# Altium PCB Four-leg-inverter.PcbDoc (part 2 of 2)
Units mm, origin at the board's own origin, x right, y up, seen from the top; angles counter-clockwise.
Board outline 253 x 158 mm, 4 copper layers (Top Layer, Reg_pos, REG_GND, Bottom Layer), stack 0.603 mm thick; 144 components, 93 nets, 427 pads, 715 vias.
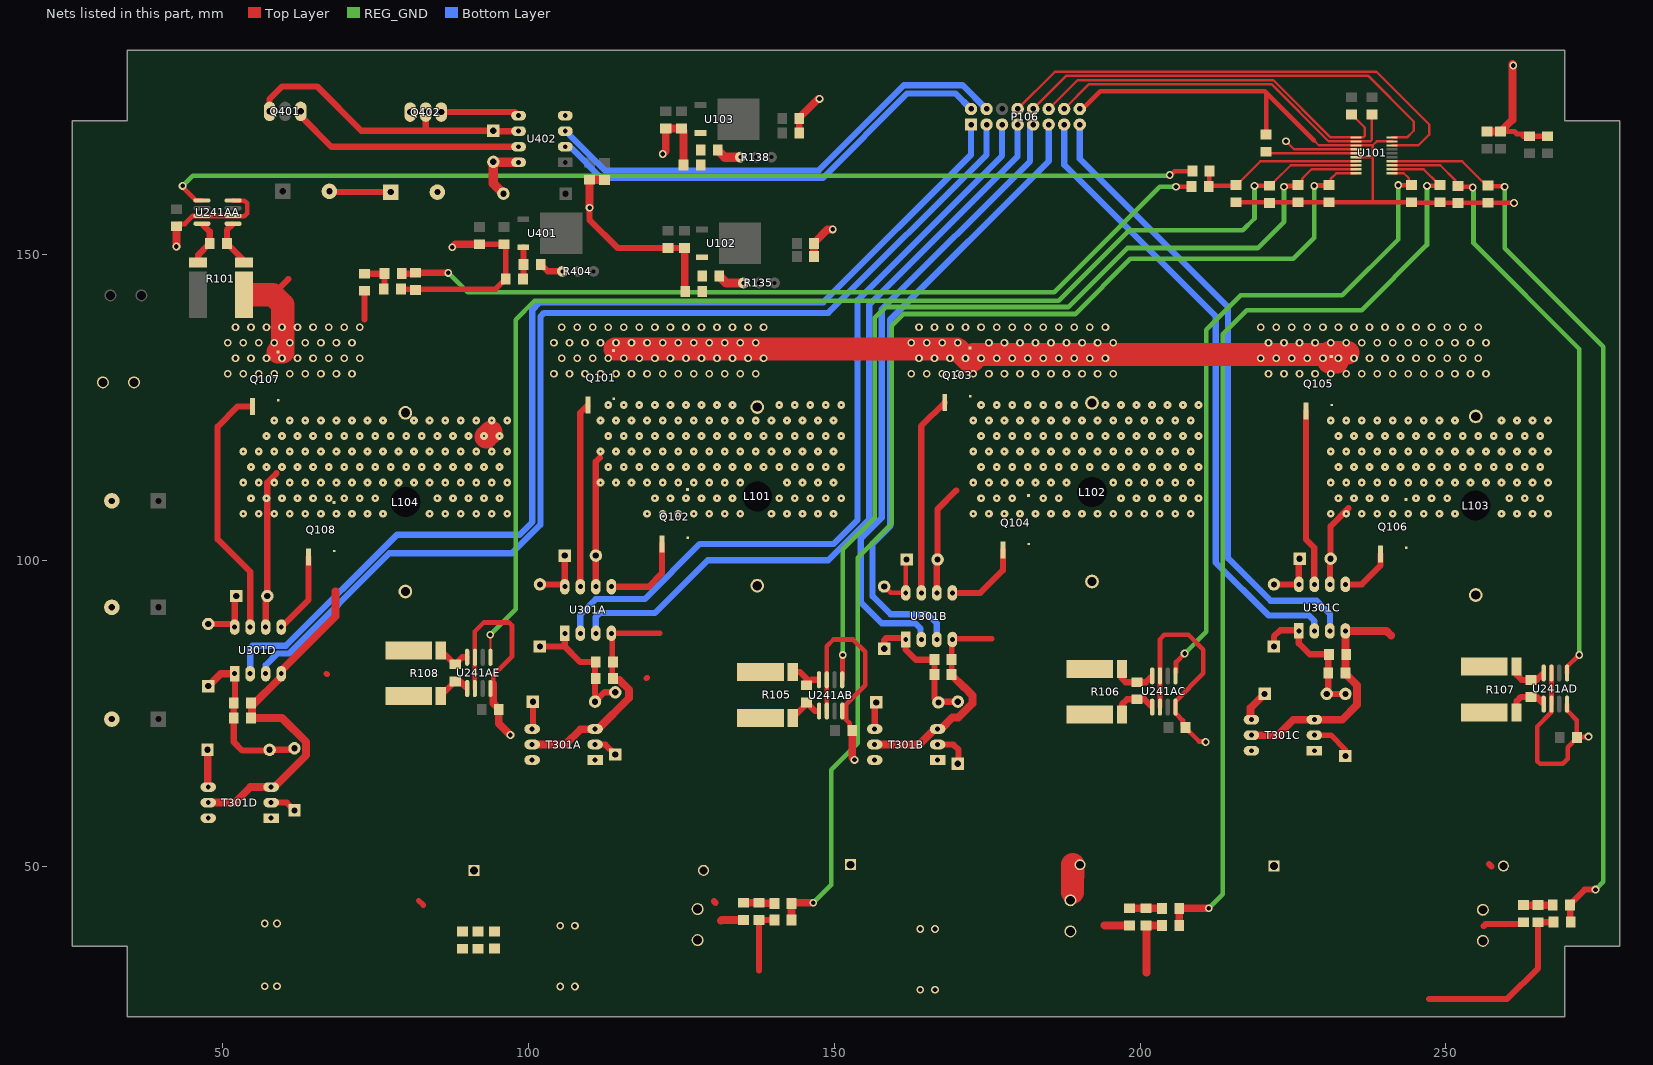
[diagram p4: the nets of this part, all layers, seen from the top]

## Via types
v1: diameter 1.27, hole 0.381, Top Layer to Bottom Layer, 436 vias
v2: diameter 1.27, hole 0.711, Top Layer to Bottom Layer, 228 vias
v3: diameter 1.27, hole 0.762, Top Layer to Bottom Layer, 47 vias
v4: diameter 5, hole 3, Top Layer to Bottom Layer, 4 vias

## Nets (pads, with @x,y where several pads share a name; then routed paths per layer and width w, separated by ;. In a path a pad name is that pad's centre, name@x,y a point inside that pad or via, vN(x,y) a via of type N, cw(c..) or ccw(c..) an arc to the next point about the centre after c; other vN are vias at no path point) (continued)
GND: C101.2 C102.2 C103.2 C104.1 C108.1 C109.1 C110.1 C116.1 C117.1 C118.1 C119.1 C120.1 C121.1 C122.1 C123.1 C124.1 C125.1 C126.1 C127.1 C128.1 C201A.1 C201B.1 C201C.1 C201D.1 C201E.1 C301A.1 C301B.1 C301C.1 C301D.1 C302A.1 C302B.1 C302C.1 C302D.1 C401.1 C402.1 C403.1 C404.1 C407.2 P102.1 P102.2 P106.16 Q102.2 Q104.2 Q106.2 Q108.2 Q402.3 R104.1 R109.2 R110.1 R111.2 R113.1 R116.1 R119.1 R123.1 R124.1 R125.1 R126.1 R127.1 R128.1 R129.1 R130.1 R133.1 R136.1 R402.1 T301A.3 T301A.5 T301B.3 T301B.5 T301C.3 T301C.5 T301D.3 T301D.5 U101.3 U101.4 U101.6 U101.19 U241AA.2 U241AA.4 U241AA.7 U241AB.2 U241AB.4 U241AB.7 U241AC.2 U241AC.4 U241AC.7 U241AD.2 U241AD.4 U241AD.7 U241AE.2 U241AE.4 U241AE.7 U301A.4 U301B.4 U301C.4 U301D.4 U402.4 | length 642.1
  Top Layer w0.381: v3(223.85,168.529) 225.167,167.212 U101.4@235.306,167.212 ; 228.346,168.726 229.21,167.862 U101.3@235.306,167.862 238.023,167.862 ; U101.6@235.306,165.912 238.023,165.912 ; 237.974,167.212 238.023,167.163 ; 238.227,158.56 238.023,158.764 238.023,165.912 ; U101.19@241.198,168.512 238.673,168.512 238.023,167.862 ; 238.023,165.912 238.023,167.163 ; 238.023,167.163 238.023,167.862
  Top Layer w0.762: C201A.1@42.418,154.623 42.809,155.014 43.819,155.014 45.125,156.32 U241AA.7@46.59,156.32 U241AA.2@51.69,156.32 51.721,156.289 52.888,156.289 52.897,156.28 53.529,156.28 53.975,156.726 53.975,158.383 53.529,158.829 51.721,158.829 U241AA.4@51.69,158.86 ; U241AE.2@91.226,79.063 U241AE.7@91.226,84.163 91.226,88.375 92.71,89.859 96.774,89.859 97.282,89.351 97.282,84.271 94.234,81.223 94.234,79.826 ; U241AB.2@148.757,75.38 U241AB.7@148.757,80.48 148.757,85.962 149.86,87.065 153.035,87.065 155.067,85.033 155.067,79.572 151.892,76.397 151.892,73.984 152.489,73.387 152.489,72.625 C201B.1@152.908,72.206 ; P106.16@190.119,173.806 190.463,173.806 191.018,174.361 191.093,174.361 193.459,176.727 220.345,176.727 220.599,176.473 ; U241AC.2@203.24,76.015 U241AC.7@203.24,81.115 203.24,87.105 203.962,87.827 207.899,87.827 210.312,85.414 210.312,81.535 205.78,77.003 U241AC.4@205.78,76.015 205.78,75.027 206.99,73.817 206.99,73.021 209.613,70.398 210.596,70.398 v3(210.693,70.301) ; R130.1@215.646,158.56 R126.1@225.806,158.56 R125.1@230.886,158.56 238.227,158.56 R123.1@244.348,158.56 244.409,158.5 261.052,158.5 v3(261.112,158.439) ; C120.1@220.599,169.621 220.599,176.473 ; 228.346,168.726 220.599,176.473 ; U241AD.7@267.248,82.586 U241AD.7@267.248,81.598 U241AD.2@267.248,76.498 267.217,76.467 267.217,75.136 264.922,72.841 264.922,67.191 265.368,66.745 269.113,66.745 269.902,67.534 269.902,69.466 271.399,70.963 C201D.1@271.399,71.063 ; U241AD.4@269.788,76.498 269.788,75.51 271.399,73.899 C201D.1@271.399,71.063 ; v3(273.304,71.19) 273.241,71.127 271.463,71.127 C201D.1@271.399,71.063
  Top Layer w0.889: 66.929,81.477 67.056,81.35 ; R104.1@79.121,144.342 94.615,144.342 R402.1@96.266,145.993 96.266,151.454 C402.1@96.012,151.708 C401.1@91.948,151.708 ; 82.042,44.393 82.798,43.637 ; C407.2@84.963,160.344 C407.2@85.09,160.217 ; C301A.1@113.792,80.715 113.665,80.842 113.665,87.954 U301A.4@113.538,88.081 121.412,88.081 ; 119.253,80.715 119.38,80.842 ; T301B.5@156.464,69.793 156.566,69.895 T301B.5@156.591,69.895 ; C302B.1@169.164,81.35 C301B.1@169.164,83.763 169.164,86.938 U301B.4@169.291,87.065 169.418,87.192 175.768,87.192 ; C118.1@258.953,170.123 261.187,170.123 261.593,169.717 262.535,169.717 C116.1@262.89,169.361 ; 262.636,169.361 C116.1@262.89,169.361 ; 265.557,169.361 C116.1@263.652,169.361 C116.1@262.89,169.361
  Top Layer w1.016: v3(109.982,157.677) 109.982,155.645 114.541,151.086 C122.1@122.809,151.086 C121.1@125.476,151.086 ; 137.668,32.963 R113.1@137.668,41.218 C108.1@140.208,41.218 ; C128.1@144.272,169.869 C127.1@144.272,172.282 ; 247.269,28.264 259.969,28.264 265.049,33.344 R119.1@265.049,40.837 C110.1@267.589,40.837
  Top Layer w1.27: v3(42.418,151.327) C201A.1@42.418,154.623 ; T301D.5@47.625,60.395 51.943,60.395 54.483,62.935 T301D.3@57.912,62.935 58.395,62.935 63.627,68.167 63.627,70.301 59.69,74.238 C301D.1@54.61,74.238 54.775,74.403 54.775,76.206 59.563,80.994 U301D.4@59.563,81.477 59.563,81.96 68.453,90.85 68.453,94.939 ; v3(87.503,151.2) 88.011,151.708 C401.1@91.948,151.708 ; 94.234,79.826 94.234,76.63 95.129,75.735 C201E.1@95.129,75.635 95.129,73.343 v3(97.028,71.444) ; T301A.5@100.584,69.895 106.02,69.895 108.501,72.376 110.813,72.376 T301A.3@110.871,72.435 111.354,72.435 116.441,77.522 116.441,78.855 114.846,80.45 113.957,80.45 113.792,80.615 C301A.1@113.792,80.715 ; v3(109.982,157.677) C403.1@109.982,162.249 110.014,162.217 112.363,162.217 C404.1@112.395,162.186 ; v3(121.92,166.44) 122.428,166.948 C126.1@122.428,170.631 C125.1@124.968,170.631 125.068,170.631 125.233,170.466 125.233,170.366 125.349,170.25 R136.1@125.349,164.662 ; C121.1@125.476,151.086 125.54,151.022 125.54,144.025 R133.1@125.603,143.961 ; C127.1@144.272,172.282 144.272,172.382 147.347,175.457 v3(147.574,175.457) ; C123.1@146.685,149.676 C124.1@146.685,151.835 ; C124.1@146.685,151.935 148.871,154.121 v3(149.733,154.121) ; C201B.1@152.908,72.206 152.908,67.761 v3(153.289,67.38) ; T301B.5@156.591,69.895 163.855,69.895 166.395,72.435 T301B.3@166.878,72.435 167.429,72.435 169.298,74.304 170.274,74.304 172.593,76.624 172.593,77.921 171.225,79.289 171.125,79.289 169.164,81.25 C302B.1@169.164,81.35 ; 201.041,32.582 201.041,40.196 R116.1@200.914,40.323 200.917,40.326 203.705,40.326 203.708,40.329 C109.1@203.575,40.329 ; T301C.5@218.186,71.419 222.479,71.419 225.019,73.959 T301C.3@228.473,73.959 233.02,73.959 235.458,76.397 235.458,79.599 233.553,81.504 C302C.1@233.553,81.604 U301C.4@233.553,88.462 240.284,88.462 241.046,87.7 ; C119.1@256.667,170.123 C118.1@258.953,170.123 260.858,172.028 260.858,181.172 260.985,181.045 v3(260.985,180.918)
HIN1: P106.5 U301A.2 | length 129.2
  Bottom Layer w1.016: U301A.2@108.458,88.081 108.458,91.129 110.998,93.669 118.999,93.669 128.016,102.686 149.86,102.686 153.797,106.623 153.797,142.564 177.419,166.186 P106.5@177.419,171.266
HIN2: P106.9 U301B.2 | length 103.5
  Bottom Layer w1.016: U301B.2@164.211,87.065 164.104,87.172 164.104,88.823 163.195,89.732 157.734,89.732 154.305,93.161 154.305,103.539 157.734,106.968 157.734,141.04 181.991,165.297 181.991,171.266 P106.9@182.499,171.266
HIN3: P106.13 U301C.2 | length 103.6
  Bottom Layer w1.016: P106.13@187.579,171.266 187.579,164.662 212.344,139.897 212.344,99.638 220.98,91.002 227.584,91.002 228.473,90.113 U301C.2@228.473,88.462
HIN4: P106.1 U301D.2 | length 180.7
  Bottom Layer w1.016: U301D.2@54.483,81.477 54.483,85.668 54.864,86.049 60.325,86.049 78.486,104.21 98.534,104.21 100.584,106.26 100.584,140.913 101.854,142.183 148.209,142.183 172.339,166.313 P106.1@172.339,171.266
HINP: P106.2 U402.2 | length 75.3
  Bottom Layer w1.016: U402.2@105.994,167.634 106.577,167.634 106.857,167.354 107.036,167.354 111.887,162.503 148.082,162.503 161.925,176.346 169.799,176.346 P106.2@172.339,173.806
HN: C405.1 Q401.3 Q402.2 T301A.1 T301B.1 T301C.1 T301D.1 U402.6 | length 49.9
  Top Layer w1.016: Q401.3@57.658,173.425 57.658,175.457 59.69,177.489 65.405,177.489 72.644,170.25 83.693,170.25 ; Q402.2@83.185,173.298 83.185,170.758 83.693,170.25 ; U402.6@98.374,170.174 94.31,170.174 C405.1@94.234,170.25 83.693,170.25
  other v3: 164.059,29.794 166.446,29.794 105.181,30.328 107.569,30.328 56.871,30.353 58.877,30.353 164.059,39.726 166.446,39.726 105.181,40.259 107.569,40.259 56.871,40.64 58.877,40.64
HO: Q401.1 U402.7 | length 38.7
  Top Layer w1.016: Q401.1@62.738,173.679 62.738,172.663 67.767,167.634 U402.7@98.374,167.634
HS+1: Q101.1 U301A.7 | length 30.1
  Top Layer w1.016: U301A.7@108.458,95.701 108.458,124.14 Q101.1@109.605,125.288
HS+2: Q103.1 U301B.7 | length 32.7
  Top Layer w1.016: U301B.7@164.211,94.685 164.211,121.981 Q103.1@168.037,125.808
HS+3: Q105.1 U301C.7 | length 28.9
  Top Layer w1.016: Q105.1@227.092,124.411 227.092,103.432 228.473,102.051 U301C.7@228.473,96.082
HS+4: Q107.1 U301D.7 | length 41.9
  Top Layer w1.016: U301D.7@54.483,89.097 54.483,98.114 49.149,103.448 49.149,121.863 52.459,125.173 Q107.1@54.714,125.173
HS-1: C303A.2 L101.1 Q101.2 Q102.3 U301A.6 | length 21
  Top Layer w1.016: U301A.6@110.998,95.701 C303A.2@110.998,100.4 ; C303A.2@110.998,100.781 110.998,116.148 111.633,116.783
  other v1: 119.38,107.639 121.92,107.639 124.46,107.639 127,107.639 129.54,107.639 132.08,107.639 134.62,107.639 139.7,107.639 142.24,107.639 144.78,107.639 147.32,107.639 149.86,107.639 120.65,110.179 123.19,110.179 125.73,110.179 128.27,110.179 130.81,110.179 133.35,110.179 140.97,110.179 143.51,110.179 146.05,110.179 148.59,110.179 151.13,110.179 111.76,112.719 114.3,112.719 116.84,112.719 119.38,112.719 121.92,112.719 124.46,112.719 127,112.719 129.54,112.719 132.08,112.719 134.62,112.719 142.24,112.719 144.78,112.719 147.32,112.719 149.86,112.719 113.03,115.259 115.57,115.259 118.11,115.259 120.65,115.259 123.19,115.259 125.73,115.259 128.27,115.259 130.81,115.259 133.35,115.259 135.89,115.259 138.43,115.259 140.97,115.259 143.51,115.259 146.05,115.259 148.59,115.259 151.13,115.259 111.76,117.799 114.3,117.799 116.84,117.799 119.38,117.799 121.92,117.799 124.46,117.799 127,117.799 129.54,117.799 132.08,117.799 134.62,117.799 137.16,117.799 139.7,117.799 142.24,117.799 144.78,117.799 147.32,117.799 149.86,117.799 113.03,120.339 115.57,120.339 118.11,120.339 120.65,120.339 123.19,120.339 125.73,120.339 128.27,120.339 130.81,120.339 133.35,120.339 135.89,120.339 138.43,120.339 140.97,120.339 143.51,120.339 146.05,120.339 148.59,120.339 151.13,120.339 111.76,122.879 114.3,122.879 116.84,122.879 119.38,122.879 121.92,122.879 124.46,122.879 127,122.879 129.54,122.879 132.08,122.879 134.62,122.879 137.16,122.879 139.7,122.879 142.24,122.879 144.78,122.879 147.32,122.879 149.86,122.879 113.03,125.419 115.57,125.419 118.11,125.419 120.65,125.419 123.19,125.419 125.73,125.419 128.27,125.419 130.81,125.419 133.35,125.419 140.97,125.419 143.51,125.419 146.05,125.419 148.59,125.419 151.13,125.419
HS-2: C303B.2 L102.1 Q103.2 Q104.3 U301B.6 | length 18.1
  Top Layer w1.016: U301B.6@166.751,94.685 166.751,100.019 C303B.2@166.878,100.146 166.878,108.401 169.926,111.449
  other v1: 172.72,107.639 175.26,107.639 177.8,107.639 180.34,107.639 182.88,107.639 185.42,107.639 187.96,107.639 190.5,107.639 193.04,107.639 195.58,107.639 198.12,107.639 200.66,107.639 203.2,107.639 205.74,107.639 208.28,107.639 173.99,110.179 176.53,110.179 179.07,110.179 184.15,110.179 186.69,110.179 196.85,110.179 199.39,110.179 201.93,110.179 204.47,110.179 207.01,110.179 209.55,110.179 172.72,112.719 175.26,112.719 177.8,112.719 180.34,112.719 182.88,112.719 185.42,112.719 187.96,112.719 195.58,112.719 198.12,112.719 200.66,112.719 203.2,112.719 205.74,112.719 208.28,112.719 173.99,115.259 176.53,115.259 179.07,115.259 181.61,115.259 184.15,115.259 186.69,115.259 189.23,115.259 191.77,115.259 194.31,115.259 196.85,115.259 199.39,115.259 201.93,115.259 204.47,115.259 207.01,115.259 209.55,115.259 172.72,117.799 175.26,117.799 177.8,117.799 180.34,117.799 182.88,117.799 185.42,117.799 187.96,117.799 190.5,117.799 193.04,117.799 195.58,117.799 198.12,117.799 200.66,117.799 203.2,117.799 205.74,117.799 208.28,117.799 173.99,120.339 176.53,120.339 179.07,120.339 181.61,120.339 184.15,120.339 186.69,120.339 189.23,120.339 191.77,120.339 194.31,120.339 196.85,120.339 199.39,120.339 201.93,120.339 204.47,120.339 207.01,120.339 209.55,120.339 172.72,122.879 175.26,122.879 177.8,122.879 180.34,122.879 182.88,122.879 185.42,122.879 187.96,122.879 190.5,122.879 193.04,122.879 195.58,122.879 198.12,122.879 200.66,122.879 203.2,122.879 205.74,122.879 208.28,122.879 173.99,125.419 176.53,125.419 179.07,125.419 181.61,125.419 184.15,125.419 186.69,125.419 189.23,125.419 194.31,125.419 196.85,125.419 199.39,125.419 201.93,125.419 204.47,125.419 207.01,125.419 209.55,125.419
HS-3: C303C.2 L103.1 Q105.2 Q106.3 U301C.6 | length 13.7
  Top Layer w1.016: U301C.6@231.013,96.082 231.013,100.146 C303C.2@231.14,100.273 231.14,105.607 234.061,108.528
  other v1: 231.14,107.639 233.68,107.639 236.22,107.639 238.76,107.639 241.3,107.639 243.84,107.639 246.38,107.639 248.92,107.639 251.46,107.639 259.08,107.639 261.62,107.639 264.16,107.639 266.7,107.639 232.41,110.179 234.95,110.179 237.49,110.179 240.03,110.179 245.11,110.179 247.65,110.179 250.19,110.179 260.35,110.179 262.89,110.179 265.43,110.179 231.14,112.719 233.68,112.719 236.22,112.719 238.76,112.719 241.3,112.719 243.84,112.719 246.38,112.719 248.92,112.719 251.46,112.719 254,112.719 256.54,112.719 259.08,112.719 261.62,112.719 264.16,112.719 266.7,112.719 232.41,115.259 234.95,115.259 237.49,115.259 240.03,115.259 242.57,115.259 245.11,115.259 247.65,115.259 250.19,115.259 252.73,115.259 255.27,115.259 257.81,115.259 260.35,115.259 262.89,115.259 265.43,115.259 231.14,117.799 233.68,117.799 236.22,117.799 238.76,117.799 241.3,117.799 243.84,117.799 246.38,117.799 248.92,117.799 251.46,117.799 254,117.799 256.54,117.799 259.08,117.799 261.62,117.799 264.16,117.799 266.7,117.799 232.41,120.339 234.95,120.339 237.49,120.339 240.03,120.339 242.57,120.339 245.11,120.339 247.65,120.339 250.19,120.339 252.73,120.339 255.27,120.339 257.81,120.339 260.35,120.339 262.89,120.339 265.43,120.339 231.14,122.879 233.68,122.879 236.22,122.879 238.76,122.879 241.3,122.879 243.84,122.879 246.38,122.879 248.92,122.879 251.46,122.879 259.08,122.879 261.62,122.879 264.16,122.879 266.7,122.879
HS-4: C303D.2 L104.1 Q107.2 Q108.3 U301D.6 | length 27
  Top Layer w1.016: U301D.6@57.023,89.097 57.023,93.923 C303D.2@57.277,94.177 57.277,112.719 58.801,114.243
  Top Layer w3.81: v1@93.091,120.212 93.853,120.974
  other v1: 53.34,107.639 55.88,107.639 58.42,107.639 60.96,107.639 63.5,107.639 66.04,107.639 68.58,107.639 71.12,107.639 73.66,107.639 76.2,107.639 83.82,107.639 86.36,107.639 88.9,107.639 91.44,107.639 93.98,107.639 96.52,107.639 54.61,110.179 57.15,110.179 59.69,110.179 62.23,110.179 64.77,110.179 67.31,110.179 69.85,110.179 72.39,110.179 74.93,110.179 85.09,110.179 87.63,110.179 90.17,110.179 92.71,110.179 95.25,110.179 53.34,112.719 55.88,112.719 58.42,112.719 60.96,112.719 63.5,112.719 66.04,112.719 68.58,112.719 71.12,112.719 73.66,112.719 76.2,112.719 78.74,112.719 81.28,112.719 83.82,112.719 86.36,112.719 88.9,112.719 91.44,112.719 93.98,112.719 96.52,112.719 54.61,115.259 57.15,115.259 59.69,115.259 62.23,115.259 64.77,115.259 67.31,115.259 69.85,115.259 72.39,115.259 74.93,115.259 77.47,115.259 80.01,115.259 82.55,115.259 85.09,115.259 87.63,115.259 90.17,115.259 92.71,115.259 95.25,115.259 53.34,117.799 55.88,117.799 58.42,117.799 60.96,117.799 63.5,117.799 66.04,117.799 68.58,117.799 71.12,117.799 73.66,117.799 76.2,117.799 78.74,117.799 81.28,117.799 83.82,117.799 86.36,117.799 88.9,117.799 91.44,117.799 93.98,117.799 96.52,117.799 57.15,120.339 59.69,120.339 62.23,120.339 64.77,120.339 67.31,120.339 69.85,120.339 72.39,120.339 74.93,120.339 77.47,120.339 80.01,120.339 82.55,120.339 85.09,120.339 87.63,120.339 90.17,120.339 92.71,120.339 95.25,120.339 58.42,122.879 60.96,122.879 63.5,122.879 66.04,122.879 68.58,122.879 71.12,122.879 73.66,122.879 76.2,122.879 81.28,122.879 83.82,122.879 86.36,122.879 88.9,122.879 91.44,122.879 93.98,122.879 96.52,122.879
IS+1: C111.2 R101.2 U241AA.8 | length 7.4
  Top Layer w1.016: R101.2@45.974,148.711 45.974,149.936 C111.2@47.873,151.835 47.873,153.767 U241AA.8@46.802,154.838
IS+2: C112.2 R105.2 U241AB.8 | length 6
  Top Layer w1.016: R105.2@143.18,81.731 144.399,81.731 145.415,80.715 C112.2@145.415,79.578 146.317,80.48 U241AB.8@147.294,80.48
IS+3: C113.2 R106.2 U241AC.8 | length 6.9
  Top Layer w1.016: R106.2@197.028,82.239 197.028,80.766 196.977,80.715 197.606,80.086 C113.2@199.517,80.086 200.941,80.086 U241AC.8@201.762,80.907
IS+4: C114.2 R107.2 U241AD.8 | length 6.3
  Top Layer w1.016: R107.2@261.544,82.62 261.544,81.299 262.376,80.467 C114.2@263.906,80.467 264.847,80.467 U241AD.8@265.821,81.44
IS+5: C115.2 R108.2 U241AE.8 | length 5.6
  Top Layer w1.016: R108.2@85.649,85.287 87.929,83.007 C115.2@88.011,83.007 89.167,84.163 U241AE.8@89.824,84.163
IS-1: C111.1 R101.3 U241AA.1 | length 7.7
  Top Layer w1.016: U241AA.1@51.543,154.903 50.673,154.033 C111.1@50.673,151.835 53.442,149.066 R101.3@53.442,148.711
IS-2: C112.1 R105.3 U241AB.1 | length 5.9
  Top Layer w1.016: R105.3@143.18,74.263 145.415,76.499 C112.1@145.415,76.778 146.813,75.38 U241AB.1@147.275,75.38
IS-3: C113.1 R106.3 U241AC.1 | length 7.2
  Top Layer w1.016: R106.3@197.028,74.771 197.028,76.448 197.866,77.286 C113.1@199.517,77.286 200.699,77.286 U241AC.1@201.769,76.216
IS-4: C114.1 R107.3 U241AD.1 | length 6.8
  Top Layer w1.016: R107.3@261.544,75.152 261.544,76.956 262.255,77.667 C114.1@263.906,77.667 264.809,77.667 U241AD.1@265.798,76.678
IS-5: C115.1 R108.3 U241AE.1 | length 5.5
  Top Layer w1.016: R108.3@85.649,77.819 85.649,77.845 C115.1@88.011,80.207 88.812,80.207 U241AE.1@89.767,79.252
ISO1: R121.2 U241AA.5 | length 170.1
  Top Layer w0.762: v3@43.561,160.979 43.561,160.901 45.602,158.86 U241AA.5@46.59,158.86 ; v3@204.724,163.011 204.988,163.011 205.623,163.646 R121.2@208.534,163.646
  REG_GND w0.762: v3(43.434,161.233) 45.085,162.884 v3@204.851,162.884
  other v3: 204.851,163.011
ISO2: R126.2 U101.9 U241AB.5 | length 154.1
  Top Layer w0.381: R126.2@225.879,161.36 226.489,161.97 226.489,162.424 228.027,163.962 U101.9@235.306,163.962
  Top Layer w0.762: U241AB.5@151.297,80.48 151.328,80.511 151.328,84.469 v2(151.384,84.525) ; v3@223.393,160.979 223.617,161.203 225.649,161.203 R126.2@225.806,161.36
  REG_GND w0.762: v2(151.384,84.525) 151.257,84.525 151.384,84.652 151.384,101.797 156.591,107.004 156.591,139.643 158.369,141.421 188.214,141.421 197.866,151.073 219.202,151.073 223.52,155.391 v3@223.52,161.155
  other v3: 223.52,161.106
ISO3: R123.2 U101.11 U241AC.5 | length 111.6
  Top Layer w0.381: U241AC.5@205.78,81.115 205.78,81.644 U241AC.5@205.867,81.731 ; U101.11@241.198,163.312 243.109,163.312 243.912,162.508 243.912,161.796 R123.2@244.348,161.36
  Top Layer w0.762: U241AC.5@205.867,81.731 205.867,83.382 v3(207.264,84.779) ; v3(242.189,161.36) R123.2@244.348,161.36
  REG_GND w0.762: v3(207.264,84.779) 210.82,88.335 210.82,137.738 216.408,143.326 233.045,143.326 242.189,152.47 v3(242.189,161.36)
ISO4: R127.2 U101.13 U241AD.5 | length 102.4
  Top Layer w0.381: U101.13@241.198,164.612 249.048,164.612 251.567,162.093 251.567,161.97 R127.2@252.152,161.384
  Top Layer w0.762: R127.2@251.968,161.233 252.125,161.076 254.284,161.076 v3(254.381,160.979) ; U241AD.5@269.788,81.598 269.788,82.586 v3@271.78,84.578
  REG_GND w0.762: v3@254.508,161.106 254.508,151.835 271.78,134.563 v3(271.78,84.525)
ISO5: R129.2 U101.8 U241AE.5 | length 207.7
  Top Layer w0.381: v2(93.726,87.827) 93.766,87.787 U241AE.5@93.766,84.163 ; R129.2@221.361,161.36 221.361,161.393 221.817,161.849 221.85,161.849 224.613,164.612 U101.8@235.306,164.612
  Top Layer w0.762: v3(218.694,161.233) 218.697,161.236 221.104,161.236 R129.2@221.107,161.239
  REG_GND w0.762: v2(93.726,87.827) 97.902,92.003 97.902,139.374 100.965,142.437 186.69,142.437 198.247,153.994 216.789,153.994 218.694,155.899 v3(218.694,161.233)
LIN1: P106.7 U301A.3 | length 128.6
  Bottom Layer w1.016: U301A.3@110.998,88.081 110.998,90.748 111.633,91.383 120.65,91.383 129.286,100.019 148.989,100.019 155.702,106.732 155.702,141.802 179.959,166.059 P106.7@179.959,171.266
LIN2: P106.11 U301B.3 | length 104.2
  Bottom Layer w1.016: U301B.3@166.751,87.065 166.751,89.732 165.291,91.193 159.195,91.193 156.25,94.137 156.25,102.726 159.131,105.607 159.131,139.389 185.039,165.297 185.039,171.139 184.912,171.266 P106.11@185.039,171.266
LIN3: P106.15 U301C.3 | length 104.2
  Bottom Layer w1.016: P106.15@190.119,171.266 190.119,165.678 214.376,141.421 214.376,100.36 221.321,93.415 228.854,93.415 231.013,91.256 U301C.3@231.013,88.462
LIN4: P106.3 U301D.3 | length 179
  Bottom Layer w1.016: U301D.3@57.023,81.477 57.023,82.874 58.928,84.779 60.851,84.779 77.234,101.162 97.282,101.162 101.927,105.807 101.927,139.864 102.522,140.459 149.025,140.459 174.879,166.313 174.879,171.393 P106.3@174.879,171.266
LINP: P106.4 U402.3 | length 79
  Bottom Layer w1.016: U402.3@105.994,170.174 106.275,170.174 106.705,169.743 106.705,169.546 112.478,163.773 147.447,163.773 161.374,177.7 170.96,177.7 174.853,173.806 P106.4@174.879,173.806
LO: Q402.1 U402.5 | length 12.9
  Top Layer w1.016: Q402.1@85.725,173.298 97.79,173.298 U402.5@98.374,172.714
LS+1: Q102.1 U301A.5 | length 14
  Top Layer w1.016: U301A.5@113.538,95.701 119.634,95.701 121.809,97.876 Q102.1@121.809,102.694
LS+2: Q104.1 U301B.5 | length 13.1
  Top Layer w1.016: U301B.5@169.291,94.685 173.863,94.685 177.562,98.384 Q104.1@177.562,101.678
LS+3: Q106.1 U301C.5 | length 8.9
  Top Layer w1.016: U301C.5@233.553,96.082 236.22,96.082 239.284,99.146 Q106.1@239.284,101.043
LS+4: Q108.1 U301D.5 | length 13.3
  Top Layer w1.016: U301D.5@59.563,89.097 64.024,93.558 Q108.1@64.024,100.535
NetC105_1: C105.1 C106.1 C107.1 R108.4 R109.1 R110.2 R111.1
NetC105_2: C105.2 P103.1 P103.2 R105.4 R112.2 | length 4.1
  Top Layer w1.016: 130.302,44.266 130.55,44.018
  Top Layer w1.27: 131.445,41.091 131.572,41.218 R112.2@135.128,41.218
NetC106_2: C106.2 P104.1 P104.2 R106.4 R115.2 | length 9.2
  Top Layer w1.016: 188.917,45.686 189.316,45.288
  Top Layer w1.27: 194.183,40.329 194.189,40.323 R115.2@198.247,40.323
  Top Layer w3.81: 188.917,45.686 188.976,50.256 188.976,50.27
NetC107_2: C107.2 P105.1 P105.2 R107.4 R118.2 | length 7.3
  Top Layer w1.016: 256.159,40.202 256.502,40.545 262.344,40.545 R118.2@262.636,40.837 ; 257.048,50.337 257.423,49.962
NetC120_2: C120.2 U101.5 | length 14.8
  Top Layer w0.381: C120.2@220.599,166.821 220.853,166.567 223.73,166.567 223.735,166.562 U101.5@235.306,166.562
NetC301A_2: C301A.2 C302A.2 D301A.A D302A.K D303A.K U301A.1 | length 23.3
  Top Layer w1.016: D301A.A@101.473,85.541 D301A.A@101.854,85.922 105.918,85.922 ; U301A.1@105.918,88.081 105.918,85.922 ; D303A.K@114.173,78.429 112.395,78.429 D302A.K@110.871,76.905 110.871,83.261 C302A.2@110.992,83.382 108.458,83.382 105.918,85.922
NetC301B_2: C301B.2 C302B.2 D301B.A D302B.K D303B.K U301B.1 | length 22.7
  Top Layer w1.016: D301B.A@158.137,85.569 158.137,86.96 158.496,87.319 161.417,87.319 U301B.1@161.671,87.065 161.671,85.414 163.322,83.763 C301B.2@166.364,83.763 C302B.2@166.364,81.35 166.364,77.419 D302B.K@167.005,76.778 167.132,76.905 D303B.K@170.18,76.905
NetC301C_2: C301C.2 C302C.2 D301C.A D302C.K D303C.K U301C.1 | length 23.3
  Top Layer w1.016: D301C.A@221.869,85.922 221.869,87.573 222.885,88.589 225.806,88.589 U301C.1@225.933,88.462 225.933,86.43 227.711,84.652 230.626,84.652 230.753,84.525 C302C.2@230.753,81.604 230.753,78.423 D302C.K@230.505,78.175 D303C.K@233.553,78.175
NetC301D_2: C301D.2 C302D.2 D301D.A D302D.K D303D.K U301D.1 | length 26.9
  Top Layer w1.016: C301D.2@51.81,74.238 51.81,70.307 53.213,68.904 D302D.K@57.658,68.904 ; C301D.2@52.017,74.545 51.895,74.545 51.81,74.63 51.81,76.444 52.017,76.651 U301D.1@52.017,81.477 ; D302D.K@57.658,69.031 61.193,69.031 61.447,69.285 D303D.K@61.722,69.285
  Top Layer w1.27: D301D.A@47.625,79.445 49.657,81.477 U301D.1@51.943,81.477
NetC303A_1: C303A.1 D301A.K U301A.8 | length 9.5
  Top Layer w1.016: D301A.K@101.854,96.082 105.537,96.082 U301A.8@105.918,95.701 105.918,96.082 105.918,100.4 C303A.1@106.299,100.781
NetC303B_1: C303B.1 D301B.K U301B.8 | length 9.5
  Top Layer w0.762: D301B.K@158.137,95.729 159.181,94.685 U301B.8@161.671,94.685 161.671,100.019 C303B.1@161.798,100.146
NetC303C_1: C303C.1 D301C.K U301C.8 | length 8.3
  Top Layer w1.016: D301C.K@221.869,96.082 U301C.8@225.933,96.082 225.933,100.146 C303C.1@226.06,100.273
NetC303D_1: C303D.1 D301D.K U301D.8 | length 9.7
  Top Layer w1.016: D301D.K@47.625,89.605 51.435,89.605 U301D.8@51.943,89.097 51.943,93.923 C303D.1@52.197,94.177
NetC405_2: C405.2 D401.K U402.8 | length 10.1
  Top Layer w1.524: D401.K@95.885,159.963 94.234,161.614 C405.2@94.234,165.17 94.31,165.094 U402.8@98.374,165.094
NetC406_2: C406.2 C407.1 T301A.6 T301B.6 T301C.6 T301D.6 | length 10.1
  Top Layer w1.016: C406.2@67.437,160.344 67.564,160.217 C407.1@77.47,160.217
NetD302A_A: D302A.A T301A.4 | length 4.5
  Top Layer w1.016: T301A.4@100.584,72.435 100.711,72.562 D302A.A@100.711,76.905
NetD302B_A: D302B.A T301B.4 | length 4.4
  Top Layer w1.016: T301B.4@156.591,72.435 156.591,76.524 D302B.A@156.845,76.778
NetD302C_A: D302C.A T301C.4 | length 5.2
  Top Layer w1.016: T301C.4@218.059,74.111 218.186,73.984 T301C.4@218.186,73.959
  Top Layer w1.27: T301C.4@218.059,74.111 218.059,75.889 D302C.A@220.345,78.175
NetD302D_A: D302D.A T301D.4 | length 6.1
  Top Layer w1.27: D302D.A@47.498,69.031 47.562,68.968 47.562,62.999 T301D.4@47.625,62.935
NetD303A_A: D303A.A T301A.2 | length 4
  Top Layer w1.016: T301A.2@110.871,69.895 112.547,69.895 D303A.A@114.173,68.269
NetD303B_A: D303B.A T301B.2 | length 6.1
  Top Layer w1.016: T301B.2@166.878,69.895 169.443,69.895 170.307,69.031 170.307,66.872 D303B.A@170.18,66.745
NetD303C_A: D303C.A T301C.2 | length 7.1
  Top Layer w0.889: T301C.2@228.473,71.419 231.165,71.419 233.553,69.031 D303C.A@233.553,68.015
NetD303D_A: D303D.A T301D.2 | length 4.3
  Top Layer w1.016: T301D.2@57.912,60.395 60.452,60.395 D303D.A@61.722,59.125
NetL101_2: L101.2 R105.1
NetL102_2: L102.2 R106.1
NetL103_2: L103.2 R107.1
NetL104_2: L104.2 R108.1
NetQ101_3: Q101.3 Q103.3 Q105.3 Q107.3 R101.4 R102.2 | length 145.6
  Top Layer w1.016: 58.166,143.453 60.706,145.993 ; 73.152,139.389 R102.2@73.152,144.082
  Top Layer w3.81: R101.4@53.975,143.453 58.166,143.453 59.817,141.802 59.817,134.088 Q107.3@59.03,134.088 ; Q101.3@114.116,134.563 119.38,134.563 124.46,134.563 125.73,134.563 132.08,134.563 133.35,134.563 170.061,134.563 172.187,132.437 ; 172.72,132.785 172.72,133.674 230.861,133.674 ; 230.861,132.437 232.189,132.437 ; 230.988,133.928 233.934,133.928
  other v2: 50.8,130.499 53.34,130.499 55.88,130.499 58.42,130.499 60.96,130.499 63.5,130.499 66.04,130.499 68.58,130.499 71.12,130.499 104.14,130.499 106.68,130.499 109.22,130.499 111.76,130.499 114.3,130.499 116.84,130.499 119.38,130.499 121.92,130.499 124.46,130.499 127,130.499 129.54,130.499 132.08,130.499 134.62,130.499 137.16,130.499 162.56,130.499 165.1,130.499 167.64,130.499 170.18,130.499 172.72,130.499 175.26,130.499 177.8,130.499 180.34,130.499 182.88,130.499 185.42,130.499 187.96,130.499 190.5,130.499 193.04,130.499 195.58,130.499 220.98,130.499 223.52,130.499 226.06,130.499 228.6,130.499 231.14,130.499 233.68,130.499 236.22,130.499 238.76,130.499 241.3,130.499 243.84,130.499 246.38,130.499 248.92,130.499 251.46,130.499 254,130.499 256.54,130.499 52.07,133.039 54.61,133.039 57.15,133.039 59.69,133.039 62.23,133.039 64.77,133.039 67.31,133.039 69.85,133.039 72.39,133.039 105.41,133.039 107.95,133.039 110.49,133.039 113.03,133.039 115.57,133.039 118.11,133.039 120.65,133.039 123.19,133.039 125.73,133.039 128.27,133.039 130.81,133.039 133.35,133.039 135.89,133.039 138.43,133.039 163.83,133.039 166.37,133.039 168.91,133.039 171.45,133.039 173.99,133.039 176.53,133.039 179.07,133.039 181.61,133.039 184.15,133.039 186.69,133.039 189.23,133.039 191.77,133.039 194.31,133.039 219.71,133.039 222.25,133.039 224.79,133.039 227.33,133.039 229.87,133.039 232.41,133.039 234.95,133.039 237.49,133.039 240.03,133.039 242.57,133.039 245.11,133.039 247.65,133.039 250.19,133.039 252.73,133.039 255.27,133.039 50.8,135.579 53.34,135.579 55.88,135.579 58.42,135.579 60.96,135.579 63.5,135.579 66.04,135.579 68.58,135.579 71.12,135.579 104.14,135.579 106.68,135.579 109.22,135.579 111.76,135.579 114.3,135.579 116.84,135.579 119.38,135.579 121.92,135.579 124.46,135.579 127,135.579 129.54,135.579 132.08,135.579 134.62,135.579 137.16,135.579 162.56,135.579 165.1,135.579 167.64,135.579 170.18,135.579 175.26,135.579 177.8,135.579 180.34,135.579 182.88,135.579 185.42,135.579 187.96,135.579 190.5,135.579 193.04,135.579 195.58,135.579 220.98,135.579 223.52,135.579 226.06,135.579 228.6,135.579 231.14,135.579 233.68,135.579 236.22,135.579 238.76,135.579 241.3,135.579 243.84,135.579 246.38,135.579 248.92,135.579 251.46,135.579 254,135.579 256.54,135.579 52.07,138.119 54.61,138.119 57.15,138.119 59.69,138.119 62.23,138.119 64.77,138.119 67.31,138.119 69.85,138.119 72.39,138.119 105.41,138.119 107.95,138.119 110.49,138.119 113.03,138.119 115.57,138.119 118.11,138.119 120.65,138.119 123.19,138.119 125.73,138.119 128.27,138.119 130.81,138.119 133.35,138.119 135.89,138.119 138.43,138.119 163.83,138.119 166.37,138.119 168.91,138.119 171.45,138.119 173.99,138.119 176.53,138.119 179.07,138.119 181.61,138.119 184.15,138.119 186.69,138.119 189.23,138.119 191.77,138.119 194.31,138.119 219.71,138.119 222.25,138.119 224.79,138.119 227.33,138.119 229.87,138.119 232.41,138.119 234.95,138.119 237.49,138.119 240.03,138.119 242.57,138.119 245.11,138.119 247.65,138.119 250.19,138.119 252.73,138.119 255.27,138.119
NetR102_1: R102.1 R103.2 R104.2 | length 6.1
  Top Layer w1.016: R102.1@73.025,146.755 R102.1@73.152,146.882 R103.2@76.448,146.882 76.448,144.469 R104.2@76.321,144.342
NetR112_1: R112.1 R113.2 R114.2 | length 5.1
  Top Layer w1.27: R112.1@135.128,44.018 R113.2@137.668,44.018 137.735,43.952 140.142,43.952 R114.2@140.208,43.885
NetR115_1: R115.1 R116.2 R117.2 | length 5.3
  Top Layer w1.27: R115.1@198.247,43.123 R117.2@203.581,43.123
NetR118_1: R118.1 R119.2 R120.2 | length 4.8
  Top Layer w1.27: R118.1@262.636,43.637 262.639,43.634 267.459,43.634 R120.2@267.462,43.631
NetR121_1: R121.1 R122.1 R130.2 U101.7 | length 28.3
  Top Layer w0.381: R130.2@215.651,161.355 216.265,161.97 216.365,161.97 219.658,165.262 U101.7@235.306,165.262
  Top Layer w0.762: R122.1@211.201,161.106 R122.1@211.268,161.173 ; R121.1@211.334,163.646 211.268,163.58 R122.1@211.268,161.173 ; R130.2@215.646,161.36 215.519,161.233 211.328,161.233 R122.1@211.268,161.173
NetR133_2: R133.2 R134.2 U102.3
NetR134_1: R134.1 R135.1 | length 4.4
  Top Layer w1.524: R134.1@131.191,146.501 132.334,145.358 R135.1@135.128,145.358
NetR136_2: R136.2 R137.2 U103.3
NetR137_1: R137.1 R138.1 | length 4.2
  Top Layer w1.524: R137.1@130.937,167.075 132.08,165.932 R138.1@134.62,165.932
NetR402_2: R402.2 R403.2 U401.3 | length 5.5
  Top Layer w1.016: U401.3@99.155,151.206 99.155,148.406 99.155,145.765 R402.2@99.181,145.739
NetR403_1: R403.1 R404.1 | length 4
  Top Layer w1.016: R403.1@101.981,148.406 103.124,147.263 R404.1@105.537,147.263
SPI2(ADC)-MISO: P106.8 U101.18 | length 81.9
  Top Layer w0.381: P106.8@179.959,173.806 186.055,179.902 238.633,179.902 247.269,171.266 247.269,169.615 245.516,167.862 U101.18@241.198,167.862
SPI2(ADC)-MOSI: P106.14 R132.1 U101.2 | length 60.1
  Top Layer w0.381: P106.14@187.579,173.806 191.643,177.87 221.468,177.87 230.826,168.512 U101.2@235.306,168.512 237.657,168.512 237.871,168.726 R132.1@237.871,172.911
SPI2(ADC)-NCS: P106.12 R131.1 U101.1@235.306,169.162 | length 62.1
  Top Layer w0.381: P106.12@185.039,173.806 189.738,178.505 221.788,178.505 231.132,169.162 U101.1@235.306,169.162 235.318,169.175 236.505,169.175 236.728,169.398 236.728,170.758 235.279,172.208 235.279,172.308 234.669,172.917 R131.1@234.569,172.917
SPI2(ADC)-SCK: P106.10 U101.20 | length 73.1
  Top Layer w0.381: P106.10@182.499,173.806 187.96,179.267 237.236,179.267 244.729,171.774 244.729,170.25 243.641,169.162 U101.20@241.198,169.162
VS+1: C104.2 R103.1 R122.2 | length 137.9
  Top Layer w0.762: v3(205.867,161.106) 205.867,161.233 205.994,161.106 R122.2@208.401,161.106
  Top Layer w1.016: R103.1@79.248,146.882 81.401,146.882 C104.2@81.534,147.015 86.862,147.015 v3(86.868,147.009)
  REG_GND w0.762: v3@86.995,147.009 86.995,146.882 90.043,143.834 185.928,143.834 203.2,161.106 v3(205.867,161.106)
  REG_GND w1.016: v3(86.868,147.009) v3@86.995,147.009
VS+2: C108.2 R114.1 R125.2 U101.10 | length 198
  Top Layer w0.381: R114.1@143.002,43.758 143.008,43.764 143.008,43.847 R114.1@143.008,43.885 ; R125.2@230.886,161.36 231.14,161.614 231.14,162.376 232.076,163.312 U101.10@235.306,163.312
  Top Layer w0.762: v3(228.473,161.233) 228.537,161.297 230.822,161.297 R125.2@230.886,161.36
  Top Layer w1.27: R114.1@143.002,43.758 143.002,43.841 R114.1@143.008,43.847 ; C108.2@143.008,41.218 R114.1@143.008,43.847 ; R114.1@143.008,43.885 R114.1@143.008,43.847 ; v3(146.558,44.012) 143.173,44.012 R114.1@143.008,43.847
  REG_GND w0.762: v3@146.558,43.885 v3(146.558,44.012) 149.479,46.933 149.479,65.798 153.797,70.116 153.797,100.4 159.385,105.988 159.385,138.373 161.29,140.278 189.357,140.278 198.374,149.295 225.044,149.295 228.473,152.724 v3@228.473,161.291
VS+3: C109.2 R117.1 R124.2 U101.12 | length 162
  Top Layer w0.381: U101.12@241.198,163.962 246.345,163.962 248.68,161.628 248.78,161.628 R124.2@249.047,161.36
  Top Layer w0.762: v3(246.888,161.233) 246.892,161.237 248.289,161.237 R124.2@248.412,161.36
  Top Layer w1.27: C109.2@206.375,40.329 206.378,40.332 206.378,43.12 R117.1@206.381,43.123 v3(211.201,43.123)
  REG_GND w0.762: v3(211.201,43.123) 213.512,45.434 213.512,137.001 217.424,140.913 236.22,140.913 246.888,151.581 v3(246.888,161.233)
VS+4: C110.2 R120.1 R128.2 U101.14 | length 150.1
  Top Layer w0.381: U101.14@241.198,165.262 252.638,165.262 255.831,162.07 ; 255.831,162.071 R128.2@256.541,161.361
  Top Layer w0.762: R128.2@256.872,161.282 256.96,161.194 259.5,161.194 v3(259.588,161.106)
  Top Layer w1.016: R120.1@270.262,43.631 R120.1@270.326,43.568 ; C110.2@270.389,40.837 270.326,40.901 R120.1@270.326,43.568 ; v3(274.447,46.171) 272.702,46.171 270.326,43.795 R120.1@270.326,43.568
  REG_GND w0.762: v3(259.588,161.106) 259.588,151.073 275.717,134.944 275.717,47.441 v3(274.447,46.171)
pads on no net: L101.3 L102.3 L103.3 L104.3 U101.1@234.671,170.047
copper on no net:
  other v4: 274.574,40.583 29.464,41.345 273.812,166.44 30.145,166.953

## Polygon pours and split planes (outlines as drawn)
HS-4 on Top Layer "HS-4_L01_P059" (solid, pour order 59): 62.675,106.877 98.108,106.877 98.108,126.562 62.675,126.562
HS-3 on Top Layer "HS-3_L01_P057" (solid, pour order 57): 227.965,105.099 268.478,105.099 268.478,125.673 227.965,125.673
HS-2 on Top Layer "HS-2_L01_P055" (solid, pour order 55): 168.91,126.689 168.91,125.89 168.91,105.48 210.947,105.48 210.947,126.689
HS-1 on Top Layer "HS-1_L01_P053" (solid, pour order 53): 117.475,106.75 152.273,106.75 152.273,126.816 117.475,126.816
+12 on Top Layer "+12_L01_P087" (solid, pour order 87): 136.779,144.088 136.779,147.898 131.191,147.898 131.064,148.025 131.064,159.709 144.907,159.709 144.907,147.898 262.509,147.898 262.509,167.329 267.589,167.329 267.589,144.088
+48 on Top Layer "+48_L01_P050" (solid, pour order 50): 29.909,161.562 29.909,144.671 30.036,144.798 36.259,144.798 41.192,147.065 41.192,164.477 49.715,164.477 49.379,178.707 114.237,178.707 114.237,152.978 129.54,152.978 129.54,158.126 117.92,158.387 117.92,172.484 129.223,172.484 129.223,175.481 117.92,175.481 117.92,181.299 36.259,181.299 36.259,161.562
NetC105_1 on Top Layer "NETC105_1_L01_P063" (solid, pour order 63): 76.581,78.302 76.581,73.984 88.265,61.919 88.011,38.551 95.631,38.551 95.631,63.503 82.982,78.302
GND on Top Layer "GND_L01_P045" (solid, pour order 45): 64.897,102.404 64.897,58.363 64.897,53.289 64.897,26.867 87.376,26.867 87.376,59.125 75.057,71.444 75.057,102.404
GND on Top Layer "GND_L01_P046" (solid, pour order 46): 33.528,74.111 33.528,70.047 35.052,68.523 42.672,68.523 42.672,50.997 69.781,50.997 69.781,33.794 88.258,33.852 88.258,37.535 96.194,37.564 96.194,33.852 248.412,33.852 248.412,26.994 234.95,26.994 36.068,26.994 36.068,38.17 36.068,38.568 36.068,38.932 32.766,38.932 32.766,44.901 28.956,44.901 28.956,73.708
NetR133_2 on Top Layer "NETR133_2_L01_P085" (solid, pour order 85): 127.254,150.184 127.254,142.31 129.54,142.31 129.54,150.184
+10 on Top Layer "+10_L01_P082" (solid, pour order 82): 142.24,178.823 142.24,164.789 136.144,164.789 136.144,168.599 130.81,168.599 130.81,178.95
NetR136_2 on Top Layer "NETR136_2_L01_P081" (solid, pour order 81): 127,170.504 127,163.519 129.159,163.519 129.159,170.504
+48 on Top Layer "+48_L01_P079" (solid, pour order 79): 61.087,159.074 61.087,174.949 59.309,174.949 59.309,170.377 43.688,170.377 43.688,164.541 53.842,164.541 54.356,164.027 54.356,158.956
GND on Top Layer "GND_L01_P047" (solid, pour order 47): 240.03,102.813 240.03,91.256 237.49,91.256 237.49,27.629 248.285,27.629 248.285,102.813
NetC107_2 on Top Layer "NETC107_2_L01_P060" (solid, pour order 60): 260.223,77.35 250.952,77.35 250.952,36.075 260.223,36.075
GND on Top Layer "Net" (solid, pour order 74): 178.181,103.448 178.181,95.701 174.244,91.764 174.244,30.169 181.483,30.169 184.404,33.09 184.404,86.049 186.436,88.081 186.436,103.448
GND on Top Layer "GND_L01_P048" (solid, pour order 48): 122.428,103.692 122.428,93.923 118.491,93.923 118.491,66.796 109.601,57.906 109.601,32.709 122.428,32.709 122.047,33.09 122.047,43.504 122.047,52.14 130.429,60.522 130.429,85.922 130.429,103.692
NetL101_2 on Top Layer "Net" (solid, pour order 72): 133.858,97.987 133.858,95.955 133.858,81.858 141.224,81.858 141.224,97.987
NetL102_2 on Top Layer "Net" (solid, pour order 71): 188.087,98.241 188.087,96.844 188.087,82.747 195.453,82.747 195.453,98.241
NetL103_2 on Top Layer "Net" (solid, pour order 70): 252.603,96.019 252.603,95.574 252.603,81.477 259.08,81.477 259.08,82.366 259.08,96.019
NetL104_2 on Top Layer "Net" (solid, pour order 64): 76.454,96.209 76.581,96.082 76.581,83.763 84.074,83.763 84.328,83.509 84.328,96.336
NetC105_2 on Top Layer "NETC105_2_L01_P062" (solid, pour order 62): 133.477,76.778 133.477,62.046 123.317,51.886 123.317,34.868 132.334,34.868 133.096,34.868 133.096,49.727 141.605,58.236 141.605,76.778
NetC106_2 on Top Layer "NETC106_2_L01_P061" (solid, pour order 61): 195.453,77.286 187.96,77.286 187.536,65.328 185.293,65.328 185.293,36.646 195.453,36.646
HS-4 on Top Layer "HS-4_L01_P058" (solid, pour order 58): 55.68,126.573 55.372,120.593 50.292,120.593 50.292,106.599 63.5,106.877 63.5,126.181
HS-3 on Top Layer "HS-3_L01_P056" (solid, pour order 56): 227.892,125.811 227.892,109.544 235.966,109.544 235.966,125.661
HS-2 on Top Layer "HS-2_L01_P054" (solid, pour order 54): 175.554,115.513 210.987,115.513 210.987,127.07 175.554,127.07
HS-1 on Top Layer "HS-1_L01_P052" (solid, pour order 52): 111.125,126.435 110.49,125.8 110.49,110.306 117.856,110.306 118.237,110.687 118.237,126.054
+48 on Top Layer "+48_L01_P051" (solid, pour order 51): 29.947,147.184 29.947,137.992 37.465,137.992 37.465,71.653 44.958,71.653 44.958,147.342
GND on Top Layer "GND_L01_P049" (solid, pour order 49): 36.195,68.219 36.195,128.905 28.956,128.905 28.956,127.197 28.956,68.068
NetQ101_3 on Top Layer "NETQ101_3_L01_P040" (solid, pour order 40): 49.784,139.135 51.816,139.135 51.943,147.009 66.421,147.009 74.041,139.389 74.295,139.643 258.064,139.643 258.064,129.102 49.784,129.102
NetC105_1 on Bottom Layer "NONET_L-01_P-001" (solid, pour order 93): 87.884,46.044 223.012,46.044 223.012,52.902 87.884,52.902
HS-4 on Bottom Layer "Net" (solid, pour order 78): 55.88,126.308 55.88,120.466 50.038,120.466 50.038,119.958 50.038,106.496 97.917,106.496 98.171,106.75 97.917,107.004 97.917,126.119
HS-3 on Bottom Layer "Net" (solid, pour order 77): 228.221,125.165 268.35,125.165 268.35,104.972 228.091,104.972 227.964,104.845
HS-2 on Bottom Layer "Net" (solid, pour order 76): 169.799,126.689 210.312,126.689 210.312,106.75 169.799,106.75
HS-1 on Bottom Layer "Net" (solid, pour order 73): 110.617,126.943 110.49,126.816 110.49,110.179 117.475,110.179 117.348,110.052 117.348,106.877 152.273,106.877 152.273,126.816
HN on Bottom Layer "NONET_L-01_P-001" (solid, pour order 99): 162.408,40.691 162.408,28.27 168.351,28.27 168.351,40.691
HN on Bottom Layer "NONET_L-01_P-001" (solid, pour order 98): 103.734,41.148 103.734,28.677 108.966,28.677 109.093,28.55 109.093,41.097
HN on Bottom Layer "NONET_L-01_P-001" (solid, pour order 97): 55.601,41.961 55.601,28.981 60.198,28.981 60.198,41.961
GND on Bottom Layer "NONET_L-01_P-001" (solid, pour order 91): 32.563,137.933 32.563,129.337 27.432,129.337 27.432,162.503 36.068,162.503 36.195,162.376 36.195,181.299 35.941,181.553 263.144,181.553 263.144,180.012 263.144,156.638 260.477,156.638 260.477,180.008 148.611,179.545 148.611,174.078 145.923,174.078 145.923,179.521 128.795,179.521 128.795,176.095 126.238,176.095 126.238,165.551 118.291,165.551 118.225,175.936 107.569,175.963 107.569,171.774 104.572,171.9 104.572,175.963 90.997,175.963 91.035,174.078 87.948,174.078 87.948,175.887 81.915,175.887 81.915,171.569 79.075,171.569 79.053,175.922 54.024,175.887 53.848,175.711 53.848,156.018 83.618,156.018 83.618,161.487 88.519,161.487 88.519,158.596 127.13,158.739 127.13,161.614 150.876,161.614 150.876,152.978 148.717,152.978 148.717,160.093 129.159,160.093 129.159,156.711 88.519,156.586 88.519,150.311 45.849,150.311 46.01,58.363 95.901,58.363 95.901,72.91 98.371,73.024 98.476,58.363 151.934,58.363 151.934,68.65 154.944,68.65 154.944,58.363 208.597,58.363 208.597,71.444 211.771,71.444 211.771,58.363 271.726,58.363 271.726,73.476 275.971,73.476 275.971,53.283 38.735,53.283 38.735,151.581 30.099,151.581 30.099,140.532 31.75,138.881
NetQ101_3 on Bottom Layer "Net" (solid, pour order 69): 161.163,139.643 196.406,139.643 196.66,139.643 196.914,139.643 196.914,129.102 161.163,129.102
NetQ101_3 on Bottom Layer "S" (solid, pour order 68): 102.743,139.643 139.51,139.643 139.51,129.189 102.743,129.189
+10 on Bottom Layer "+10_L04_P083" (solid, pour order 83): 130.81,178.951 130.81,168.599 136.017,168.599 136.144,168.472 136.144,164.789 142.24,164.789 142.24,178.824
NetQ101_3 on Bottom Layer "Net" (solid, pour order 65): 49.784,139.104 52.07,139.104 52.07,140.136 74.168,140.167 74.168,128.975 49.784,128.975
+12 on Bottom Layer "+12_L04_P088" (solid, pour order 88): 131.064,159.709 131.064,147.898 136.779,147.898 136.779,144.088 144.907,144.088 144.907,159.709
NetQ101_3 on Bottom Layer "Net" (solid, pour order 75): 218.313,139.643 257.747,139.643 258.001,139.643 258.255,139.643 258.255,129.102 218.313,129.102
no net on Bottom Paste "Net" (solid): 227.838,125.673 268.224,125.673 268.351,125.546 268.351,105.099 228.092,105.099
no net on Bottom Paste "Net" (solid): 233.807,139.516 233.934,139.643 257.937,139.643 257.937,129.102 257.683,129.356 233.68,129.356
no net on Bottom Paste "Net" (solid): 94.996,139.77 94.996,128.975 142.621,128.975 142.621,139.262 142.367,139.516
no net on Bottom Paste "Net" (solid): 168.91,127.197 168.91,105.48 210.947,105.48 211.074,105.607 210.947,105.734 210.947,127.197
no net on Bottom Paste "Net" (solid): 173.482,139.643 173.482,129.356 173.609,129.229 198.501,129.229 198.501,139.389 198.247,139.643
no net on Bottom Paste "Net" (solid): 55.499,126.562 55.499,121.101 48.514,121.101 48.387,120.974 48.387,106.242 98.171,106.242 98.298,106.369 98.171,106.496 98.171,126.562
HS-1 on Bottom Paste "Net" (solid): 152.273,126.816 152.273,106.877 117.348,106.877 117.348,110.052 117.221,110.179 110.617,110.179 110.617,126.816 110.49,126.943
no net on Bottom Paste "Net" (solid): 74.422,139.77 74.295,139.643 74.295,129.102 51.943,129.102 51.816,129.229 51.816,139.77
no net on Bottom Solder "Net" (solid): 168.91,127.07 168.91,105.607 169.037,105.48 210.947,105.48 210.947,126.816 210.82,126.943
no net on Bottom Solder "Net" (solid): 227.838,125.8 228.219,125.419 268.224,125.419 268.224,105.099 268.097,105.226 227.965,105.226
no net on Bottom Solder "Net" (solid): 232.283,139.389 232.283,129.356 232.156,129.229 257.937,129.229 257.937,139.135 257.429,139.643
no net on Bottom Solder "Net" (solid): 171.45,139.516 171.577,139.389 171.577,129.229 201.676,129.229 201.676,139.516
no net on Bottom Solder "Net" (solid): 94.742,139.516 94.742,129.102 141.224,129.102 141.224,139.516 141.097,139.643
no net on Bottom Solder "Net" (solid): 55.626,126.689 55.753,126.562 97.917,126.562 97.917,106.496 98.044,106.369 48.387,106.369 48.387,120.339 48.26,120.466 48.641,120.847 55.372,120.847
HS-1 on Bottom Solder "Net" (solid): 110.744,126.816 110.49,126.562 110.49,110.306 117.348,110.306 117.221,110.179 117.221,107.004 152.146,107.004 152.146,126.816
no net on Bottom Solder "Net" (solid): 51.816,139.643 73.914,139.643 74.295,139.262 74.295,128.975 51.943,128.975 51.816,129.102
GND on REG_GND "NONET_L-01_P-001" (solid, pour order 92): 34.646,129.413 34.646,132.537 27.33,132.537 27.33,159.106 35.814,159.106 35.814,181.635 225.171,182.315 225.171,167.767 222.758,167.767 222.758,179.394 38.125,179.394 38.125,154.249 29.896,154.249 29.896,135.45 36.424,135.45 36.424,129.413
NetC406_2 on REG_GND "NETC406_2_L03_P095" (solid, pour order 95): 58.284,158.816 62.89,158.816 62.89,160.916 81.382,160.902 81.382,154.064 45.796,154.064 45.796,58.778 49.087,58.778 49.153,56.718 45.796,56.718 45.796,36.977 97.587,36.909 97.587,68.25 103.572,68.25 103.572,36.9 154.838,36.974 154.838,68.507 160.668,68.507 160.668,36.296 215.77,36.033 215.725,69.799 220.294,69.799 220.294,33.223 43.586,33.223 43.586,158.761
HN on REG_GND "NONET_L-01_P-001" (solid, pour order 101): 112.497,68.368 112.497,38.379 104.445,38.379 104.394,68.326 104.352,68.368
HN on REG_GND "NONET_L-01_P-001" (solid, pour order 100): 168.3,68.377 168.3,38.379 162.281,38.379 162.23,68.326 162.23,68.402
HN on REG_GND "NONET_L-01_P-001" (solid, pour order 96): 55.982,59.03 55.982,39.167 55.905,39.091 59.665,39.091 59.665,59.03
HN on REG_GND "HN_L03_P090" (solid, pour order 90): 38.76,176.872 90.195,176.848 90.195,167.894 42.647,167.894 42.647,32.385 226.289,32.385 226.093,70.028 230.962,70.028 230.962,27.711 38.76,27.711
+10 on Reg_pos "+10_L02_P089" (solid, pour order 89): 28.41,143.219 28.41,47.842 45.969,47.842 272.415,47.842 272.415,70.369 267.251,70.473 267.251,65.304 209.032,65.304 209.032,70.174 201.958,70.174 201.958,65.304 151.384,65.902 151.384,70.936 147.193,70.936 147.193,65.304 94.869,65.304 94.869,77.667 90.518,77.667 90.518,65.304 48.641,65.304 48.641,162.757 143.383,162.757 143.383,181.328 35.958,181.328 35.958,162.757 28.41,162.396

## Silkscreen, mask and mechanical layers (free items; w line width, h text height)
Top Overlay:
  text "HINP" at 173.101,175.584 h1.52 r90
  text "LINP" at 175.641,175.584 h1.52 r90
  text "NCS" at 185.674,175.584 h1.52 r90
  text "MOSI" at 188.087,175.584 h1.52 r90
  text "GND" at 190.881,175.584 h1.52 r90
  text "MISO" at 180.594,175.457 h1.52 r90
  text "SCK" at 183.134,175.457 h1.52 r90
  text "+3V3" at 178.054,175.33 h1.52 r90
  text "LIN3" at 189.484,169.615 h1.52 r270
  text "HIN4" at 171.577,169.488 h1.52 r270
  text "LIN4" at 174.117,169.488 h1.52 r270
  text "HIN1" at 176.657,169.488 h1.52 r270
  text "LIN1" at 179.197,169.488 h1.52 r270
  text "HIN2" at 181.61,169.488 h1.52 r270
  text "LIN2" at 184.15,169.488 h1.52 r270
  text "HIN3" at 186.817,169.488 h1.52 r270
  text "C406" at 54.991,167.837 h1.52
  text "C407" at 74.168,167.202 h1.52
  text "Four Leg Inverter" at 37.668,31.75 h1.52
Mechanical 1:
  the board outline again, w0.15

## Text inside footprints (layer, text, board x,y; h text height)
P106: Top Overlay "2" at 169.799,173.298 h1.27; Top Overlay "1" at 170.053,170.758 h1.27; Top Overlay "15" at 191.643,170.758 h1.27; Top Overlay "16" at 191.643,173.298 h1.27